# EAGLE board source_eagle (EAGLE 9.6.2)
REV: B
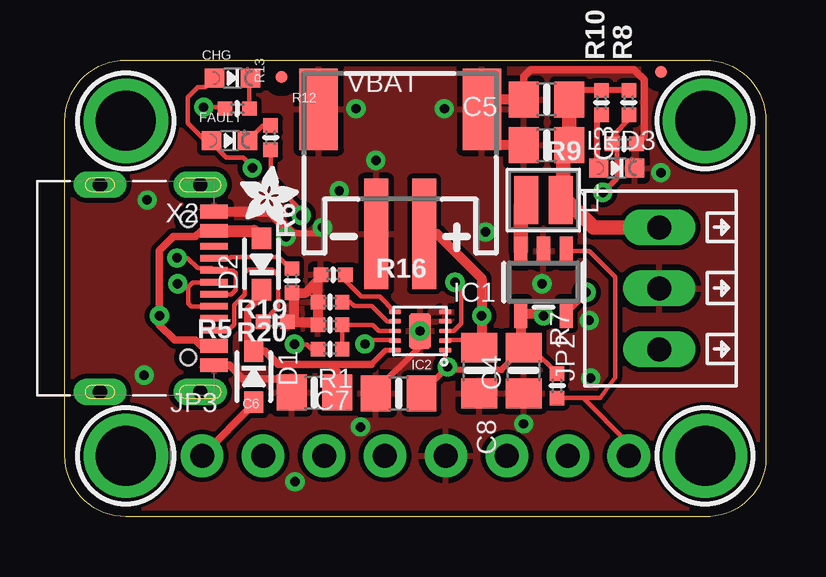
[diagram p0: board, top side]
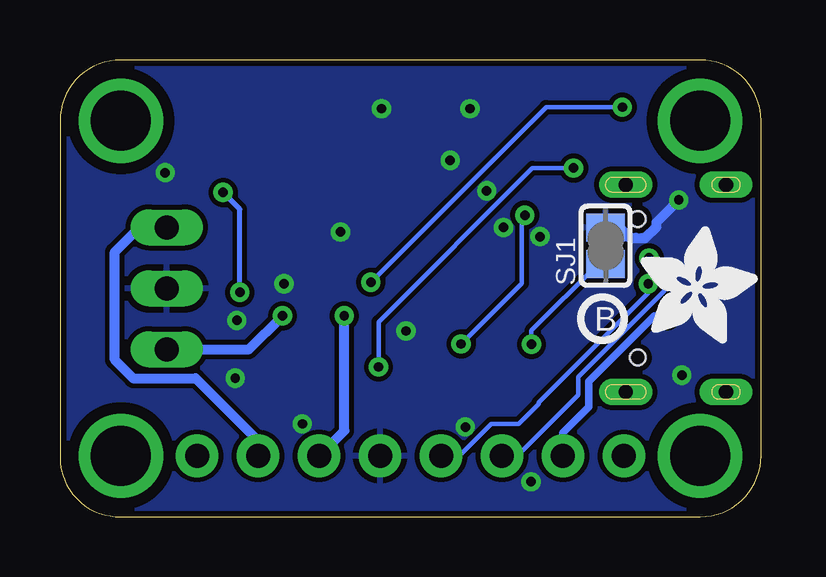
[diagram p1: board, bottom side, seen from below]

Size 29.21 x 19.05 mm. Coordinates in mm from the lower left corner, seen from the top.
Outline: 2.54,19.05 26.67,19.05 arc-90 29.21,16.51 29.21,2.41 arc-90 26.67,0 2.54,0 arc-90 0,2.54 0,16.51 arc-90 2.54,19.05
Copper layers (1*16): Top 0.035mm / dielectric 1.5mm / Bottom 0.035mm
Design rules "adafruit 7-7": minimum track width 7mil, minimum drill 15.5mil, track to track 8mil, track to pad 7mil, pad to pad 7mil, via to via 7mil, smd to smd 7mil, copper to edge 10mil, drill to drill 8mil, minimum pad ring 10mil, minimum via ring 8mil, stop-mask expansion 2mil, vias tented up to drill 20mil, thermal gap 10mil
Net classes: 1 power: width 0.305 mm, drill 0.381 mm

## Footprints (pad centres in the part's own frame; a part is rotated, then mirrored left to right if it is on the bottom)
0805-NO = smd 1.24 x 1.5: 1 -0.95,0; 2 0.95,0
CHIPLED_0603_NOOUTLINE = smd 0.8 x 0.8: A 0,-0.75; C 0,0.75
SOD-323_MINI = smd 0.9 x 0.8: A 1.07,0; C -1.07,0
FIDUCIAL_0.5MM = smd 0.5 x 0.5: 1 0,0
SOT23-5 = smd 0.55 x 1.2: 1 -0.95,-1.3; 2 0,-1.3; 3 0.95,-1.3; 4 0.95,1.3; 5 -0.95,1.3
WSON10 = smd 0.5 x 0.2: 1 -1.05,0.8; 2 -1.05,0.4; 3 -1.05,0; 4 -1.05,-0.4; 5 -1.05,-0.8; 6 1.05,-0.8; 7 1.05,-0.4; 8 1.05,0; 9 1.05,0.4; 10 1.05,0.8 | smd 0.9 x 1.5: PAD 0,0
1X03_2.54MMTERMINAL = drill 1 long: 1 2.54,0; 2 0,0; 3 -2.54,0
1X08_ROUND_70 = drill 1 pad 1.778: 1 -8.89,0; 2 -6.35,0; 3 -3.81,0; 4 -1.27,0; 5 1.27,0; 6 3.81,0; 7 6.35,0; 8 8.89,0
INDUCTOR_TAIYOYUDEN_NRH2412T = smd 1 x 2: 1 -0.725,0; 2 0.725,0
_0402NO = smd 0.6 x 0.6: 1 -0.508,0; 2 0.508,0
SOLDERJUMPER_CLOSEDWIRE = smd 1.168 x 1.6: 1 -0.762,0; 2 0.762,0 | smd 0.635 x 0.203: WIRE 0,0
MOUNTINGHOLE_2.5_PLATED = drill 2.5 pad 3.2: P$1 0,0
JSTPH2_BATT = smd 1 x 4.6: 1 -1,-2.303; 2 1,-2.303 | smd 1.6 x 3.4: NC1 -3.4,2.897; NC2 3.4,2.897
USB_C_CUSB31-CFM2AX-01-X = smd 0.575 x 1.15: A1B12 -3.2,2.275; A4B9 -2.4,2.275; B1A12 3.2,2.275; B4A9 2.4,2.275 | smd 0.275 x 1.15: A5 -1.25,2.275; A6 -0.25,2.275; A7 0.25,2.275; A8 1.25,2.275; B5 1.75,2.275; B6 0.75,2.275; B7 -0.75,2.275; B8 -1.75,2.275 | drill 0.6 pad 1 long: M1 -4.32,1.7; M2 4.32,1.7; M3 -4.32,-2.48; M4 4.32,-2.48 | hole 0.65: 2.89,1.2; -2.89,1.2

## Placement (x,y rotation side)
C3  22uF  [0805-NO]  20.07,15.49 180 top
C4  22uF  [0805-NO]  19.11,6.1 270 top
C5  22uF  [0805-NO]  20.07,17.4 180 top
C6  10uF  [0805-NO]  10.4,5.18 180 top
C7  22uF  [0805-NO]  13.91,5.14 180 top
C8  22uF  [0805-NO]  17.27,6.1 270 top
CHG  ORANGE  [CHIPLED_0603_NOOUTLINE]  6.99,18.29 270 top
D1  NSR0320  [SOD-323_MINI]  7.87,5.84 270 top
D2  NSR0320  [SOD-323_MINI]  8.19,10.54 90 top
FAULT  RED  [CHIPLED_0603_NOOUTLINE]  6.86,15.68 270 top
FID1  FIDUCIAL_0.5MM  [FIDUCIAL_0.5MM]  24.83,18.54 0 top
FID2  FIDUCIAL_0.5MM  [FIDUCIAL_0.5MM]  9.02,18.35 0 top
IC1  TLV62569  [SOT23-5]  19.94,9.78 180 top
IC2  BQ25185  [WSON10]  14.8,7.75 180 top
JP2  2.5mm_1x3  [1X03_2.54MMTERMINAL]  24.77,9.53 270 top
JP3  [1X08_ROUND_70]  14.61,2.54 0 top
L1  252012CDMCDDS-2R2MC  [INDUCTOR_TAIYOYUDEN_NRH2412T]  19.94,13.21 0 top
LED3  GREEN  [CHIPLED_0603_NOOUTLINE]  22.99,14.54 270 top
PLABEL0  [PLABEL0]  4.83,17.72 0 top
PLABEL1  [PLABEL1]  4.89,15.18 0 top
PLABEL2  [PLABEL2]  5.59,0.89 0 top
PLABEL3  [PLABEL3]  15.75,0.89 0 top
PLABEL4  [PLABEL4]  18.35,0.89 0 top
PLABEL5  [PLABEL5]  10.79,0.89 0 top
PLABEL6  [PLABEL6]  13.34,0.89 0 top
PLABEL7  [PLABEL7]  20.95,0.89 0 top
PLABEL8  [PLABEL8]  23.5,0.89 0 top
PLABEL9  [PLABEL9]  28.64,12.38 90 top
PLABEL10  [PLABEL10]  28.64,6.35 90 top
PLABEL11  [PLABEL11]  28.64,9.59 90 top
PLABEL12  [PLABEL12]  8.26,0.89 0 top
PLABEL13  [PLABEL13]  24.57,14.35 0 bottom
PLABEL14  [PLABEL14]  11.56,11.37 0 bottom
PLABEL15  [PLABEL15]  23.05,12.06 0 bottom
PLABEL16  [PLABEL16]  23.05,9.53 0 bottom
PLABEL17  [PLABEL17]  23.05,7.05 0 bottom
PLABEL18  [PLABEL18]  28.83,5.59 0 bottom
PLABEL19  [PLABEL19]  28.83,13.53 0 bottom
PLABEL20  [PLABEL20]  14.61,0.89 0 bottom
R1  600  [_0402NO]  11.05,6.99 180 top
R5  5.1K  [_0402NO]  8.76,8.13 180 top
R6  5.1K  [_0402NO]  9.46,9.84 90 top
R7  100K  [_0402NO]  20.51,5.46 270 top
R8  453K  [_0402NO]  23.5,17.27 90 top
R9  100K  [_0402NO]  23.3,15.56 180 top
R10  22K  [_0402NO]  22.35,17.27 90 top
R12  10K  [_0402NO]  7.18,17.02 0 top
R13  10K  [_0402NO]  8.57,15.81 90 top
R16  10K  [_0402NO]  11.18,10.1 0 top
R19  13K  [_0402NO]  11.05,8.95 180 top
R20  600  [_0402NO]  11.05,8 180 top
SJ1  [SOLDERJUMPER_CLOSEDWIRE]  6.48,11.3 90 bottom
U$2  [PCBFEAT-REV-040]  6.6,8.26 0 bottom
U$9  MOUNTINGHOLE2.5  [MOUNTINGHOLE_2.5_PLATED]  26.67,2.54 0 top
U$10  MOUNTINGHOLE2.5  [MOUNTINGHOLE_2.5_PLATED]  26.67,16.51 0 top
U$11  MOUNTINGHOLE2.5  [MOUNTINGHOLE_2.5_PLATED]  2.54,2.54 0 top
U$12  MOUNTINGHOLE2.5  [MOUNTINGHOLE_2.5_PLATED]  2.54,16.51 0 top
U$26  [ADAFRUIT_5MM]  5.02,7.24 0 bottom
U$34  [ADAFRUIT_2.5MM]  7.3,12.19 0 top
VBAT  JST2PH  [JSTPH2_BATT]  13.97,14.1 0 top
X2  USB C  [USB_C_CUSB31-CFM2AX-01-X]  3.94,9.53 270 top

## Library data of the parts
C3-C8 D1 D2 FID1 JP3 L1 R1 R5-R10 R12 R13 R16 R19 R20 SJ1 U$26 U$34 = microbuilder
CHG FAULT IC2 LED3 = microbuilder; ROT: 270
FID2 = microbuilder; AUTHOR: K. TOWNSEND
IC1 = adafruit_power; ROT: 270
JP2 = microbuilder; FORCETHM: 1; ROT: 180
PLABEL0 PLABEL1-PLABEL20 = pinguin
U$2 = microbuilder; REV: B
U$9-U$12 = adafruit_electromech; BOM: EXCLUDE
VBAT = adafruit_electromech; LCSC: C47647; ROT: 180
X2 = adafruit_electromech; LCSC: C165948

## Nets
3.3V: C3.1 C5.1 JP2.3 JP3.7 L1.2 R8.2 R10.2
5.0V: C4.1 C7.1 CHG.A FAULT.A IC1.4 IC2.1 JP2.1 R7.1
CC1: R6.2 X2.A5
CC2: R5.2 X2.B5
D+: JP3.4 X2.A6 X2.B6
D-: JP3.3 X2.A7 X2.B7
EN: IC1.1 JP3.8 R7.2
FB: IC1.5 R8.1 R9.2
GND: C3.2 C4.2 C5.2 C6.2 C7.2 C8.2 IC1.2 IC2.4 IC2.5 IC2.PAD JP2.2 JP3.5 LED3.C R5.1 R6.1 R9.1 R16.1 R19.2 R20.2 SJ1.2 VBAT.1 VBAT.NC1 VBAT.NC2 X2.A1B12 X2.B1A12
ISET: IC2.8 R1.1 R20.1
N$1: R1.2 SJ1.1
N$2 [power]: C6.1 D1.C D2.C IC2.10
N$4: IC1.3 L1.1
N$7: CHG.C R12.2
N$8: LED3.A R10.1
N$9: FAULT.C R13.2
STAT1: IC2.9 R13.1
STAT2: IC2.3 R12.1
THERM: IC2.6 R16.2
VBAT: C8.1 IC2.2 JP3.6 VBAT.2
VBUS [power]: D2.A JP3.2 X2.A4B9 X2.B4A9
VIN: D1.A JP3.1
VSET: IC2.7 R19.1

## Tracks (layer width: path | path; a pad name or v marks a point on that pad's centre or on a via)
3.3V
  Top 0.254: C5.1 21.4,17.78 R10.2 R8.2
  Top 0.406: 20.76,13.31 L1.2
  Top 0.61: L1.2 20.89,13.21 22.04,12.06 JP2.3 | C5.1 C3.1 20.76,15.24 20.76,13.31
  Bottom 0.406: JP2.3 25.91,12.06 26.92,11.05 26.92,6.54 26.16,5.78 23.56,5.78 20.95,3.17 JP3.7
5.0V  (via drill 0.39)
  Top 0.178: CHG.A 5.85,17.91 5.52,17.91 5.11,17.49 5.11,16.41 5.84,15.68 6.03,15.68 | 6.03,15.68 6.73,14.99 7.43,14.99 7.81,14.61 v7.81,14.54 | IC2.1 15.85,6.13 C7.1 | R7.1 19.43,7.05 C4.1 | 6.03,15.68 FAULT.A
  Top 0.254: C7.1 15.94,6.23 v15.94,6.25 16.07,6.12 18.19,6.12 C4.1
  Top 0.406: C4.1 18.99,7.17 IC1.4 19.84,8.48 v19.94,8.38
  Bottom 0.178: v15.94,6.25 15.94,8.13 9.53,14.54 v7.81,14.54
  Bottom 0.406: JP2.1 21.34,6.99 v19.94,8.38
CC1
  Top 0.178: R6.2 9.46,10.29 8.91,10.84 6.91,10.84 6.85,10.78 X2.A5
CC2
  Top 0.178: X2.B5 6.24,7.81 6.83,7.81 7.05,8.03 7.05,8.83 7.49,9.27 7.49,10.16 7.65,10.31 8.64,10.31 8.89,10.06 8.89,8.76 R5.2
D+  (via drill 0.39)
  Top 0.178: X2.B6 5.26,8.78 5.14,8.89 5.14,9.46 | 5.14,9.46 5.14,9.59 5.33,9.78 X2.A6 | 5.14,9.46 4.89,9.72 v4.7,9.72
  Bottom 0.178: v4.7,9.72 4.7,9.34 9.27,4.76 9.27,4.7 10.1,3.87 11.24,3.87 12.57,2.54 JP3.4
D-  (via drill 0.39)
  Top 0.178: X2.A7 6.93,9.28 7.11,9.46 7.11,10.16 7,10.28 X2.B7 6.12,10.37 5.53,10.37 5.1,10.79 v4.67,10.79
  Bottom 0.178: v4.67,10.79 4.03,10.16 4.03,9.42 7.62,5.84 7.62,5.08 10.16,2.54 JP3.3
EN
  Top 0.178: IC1.1 21.84,11.08 22.92,10 22.92,5.81 22.3,4.95 R7.2 21.59,4.95 23.5,3.05 JP3.8
FB  (via drill 0.39)
  Top 0.203: IC1.5 21.72,9.31 v21.72,9.36 | R8.1 23.5,16.57 22.86,15.94 22.86,15.81 | 22.99,15.81 22.99,15.56 22.99,14.1 v22.42,13.53
  Top 0.305: R9.2 22.99,15.56 | 22.99,15.81 22.86,15.81
  Bottom 0.203: v21.72,9.36 21.72,12.83 v22.42,13.53
GND  (via drill 0.39)
  Top 0.254: C7.2 12.96,5.27 14.8,7.11 IC2.PAD | v10.73,12.06 10.48,11.81 9.44,11.81
  Top 0.305: R9.1 24.13,15.88 24.13,18.22 23.71,18.64 19.41,18.64 19.11,18.35 C5.2 | 9.26,5.3 9.26,5.75 7.42,5.75 6.85,6.33 X2.B1A12
  Top 0.406: X2.B1A12 6.59,6.33 | 9.26,5.3 9.38,5.18 C6.2 | C5.2 17.91,17.4 17.72,17.59 17.37,17.24 VBAT.NC2 17.37,16.16 18.03,15.49 C3.2 | X2.A1B12 8.53,12.72 9.44,11.81 | R16.1 10.67,9.97 10.54,9.84 | 10.54,9.84 10.03,9.34 R6.1 9.53,9.27 9.53,8.13 | R5.1 9.53,8.13 | 9.53,8.13 10.41,8.13 | 10.41,8.13 R20.2 | 10.54,9.84 R19.2 10.54,8.26 10.41,8.13
  Bottom 0.406: SJ1.2 5.89,12.06 5.46,11.63 5.22,11.63 5.21,11.62 4.83,11.62 4.36,12.09 4.36,12.28 v3.43,13.21
  other vias: 12.95,14.86 11.43,13.59 3.3,5.91 9.59,1.46 19.11,3.87 19.88,9.72 14.8,7.75 17.53,11.87 15.81,17.02 12.13,17.02 21.84,8.19 9.21,11.68 21.91,5.78 24.83,14.35 12.32,3.75
  pour Top (isolate 0.203): 0,0 0,19.05 29.21,19.05 29.21,0
  pour Bottom (isolate 0.203): 0,19.05 29.21,19.05 29.21,0 0,0
ISET
  Top 0.178: IC2.8 13.07,7.75 12.82,8 R20.1 R1.1
N$1  (via drill 0.39)
  Top 0.178: R1.2 10.28,6.99 10.07,7.2 v9.56,7.2
  Bottom 0.178: v9.56,7.2 9.56,7.77 6.79,10.54 SJ1.1
N$2
  Top 0.203: 12.76,6.35 13.36,6.95 IC2.10
  Top 0.305: D2.C 8.19,9.22 7.62,8.65 7.62,7.17 D1.C 8.32,6.91 8.88,6.35 11.05,6.35 | 11.05,6.35 11.35,6.05 C6.1 | 11.05,6.35 12.76,6.35
N$4
  Top 0.61: IC1.3 18.99,12.98 L1.1
N$7
  Top 0.178: CHG.C 7.75,18.28 7.61,18.28 7.68,18.2 R12.2
N$8
  Top 0.254: R10.1 22.16,16.57 22.16,14.62 LED3.A
N$9
  Top 0.178: R13.2 8.24,16.32 FAULT.C
STAT1  (via drill 0.39)
  Top 0.178: IC2.9 13.73,7.37 12.7,7.37 12.68,7.39 v12.5,7.21 | v9.84,12.57 9.84,12.76 8.57,14.03 R13.1
  Bottom 0.178: v12.5,7.21 9.97,9.74 9.97,12.45 v9.84,12.57
STAT2  (via drill 0.39)
  Top 0.178: IC2.3 16.19,7.75 16.51,8.06 16.51,9.53 v16.26,9.78 | v5.78,17.08 6.6,17.08 R12.1
  Bottom 0.178: v16.26,9.78 8.95,17.08 v5.78,17.08
THERM
  Top 0.178: IC2.6 13.11,9.18 12.35,9.18 11.68,9.84 R16.2
VBAT  (via drill 0.39)
  Top 0.178: IC2.2 15.86,7.37 17.37,7.37
  Top 0.406: C8.1 17.37,7.14 17.37,7.37 v17.37,8.38 17.37,9.94 15.51,11.79 VBAT.2
  Bottom 0.406: JP3.6 17.37,3.59 v17.37,8.38
VBUS  (via drill 0.39)
  Top 0.305: X2.B4A9 5.68,7.12 5.44,7.37 4.83,7.37 | 4.83,7.37 | 4.83,7.37 4.57,7.37 3.94,8 v3.94,8.38 3.94,11.11 4.51,11.68 4.83,11.68 | 4.83,11.68 5.44,11.68 5.68,11.93 X2.A4B9 | 4.83,11.68
  Top 0.508: X2.A4B9 7.88,11.93 D2.A
  Bottom 0.305: v3.94,8.38 4.45,8.38 7.18,5.65 7.18,4.57 8.26,3.49 JP3.2
VIN
  Top 0.305: JP3.1 7.87,4.7 D1.A
VSET
  Top 0.178: IC2.7 13.43,8.15 12.79,8.78 12.05,8.78 11.87,8.95 R19.1

## Text on the board
Pinguin_tBackup: C | F | 3V | – | 4.5V | VIN | VU | D- | D+ | G | BAT | 3V | EN
Pinguin_bBackup: 3.7V/4.2V LiPoly/LiIon / Battery Charger & 3.3V buck / Default 1A charge rate | Buck Out (1A max) | 3.3V | Cut jumper / for 0.5A -> | GND | 4.5Vmax | Power Path Out (3A max) | Vin: 5~18V Max, Solar OK